# EAGLE board 01-pushbutton interface (EAGLE 9.3.0)
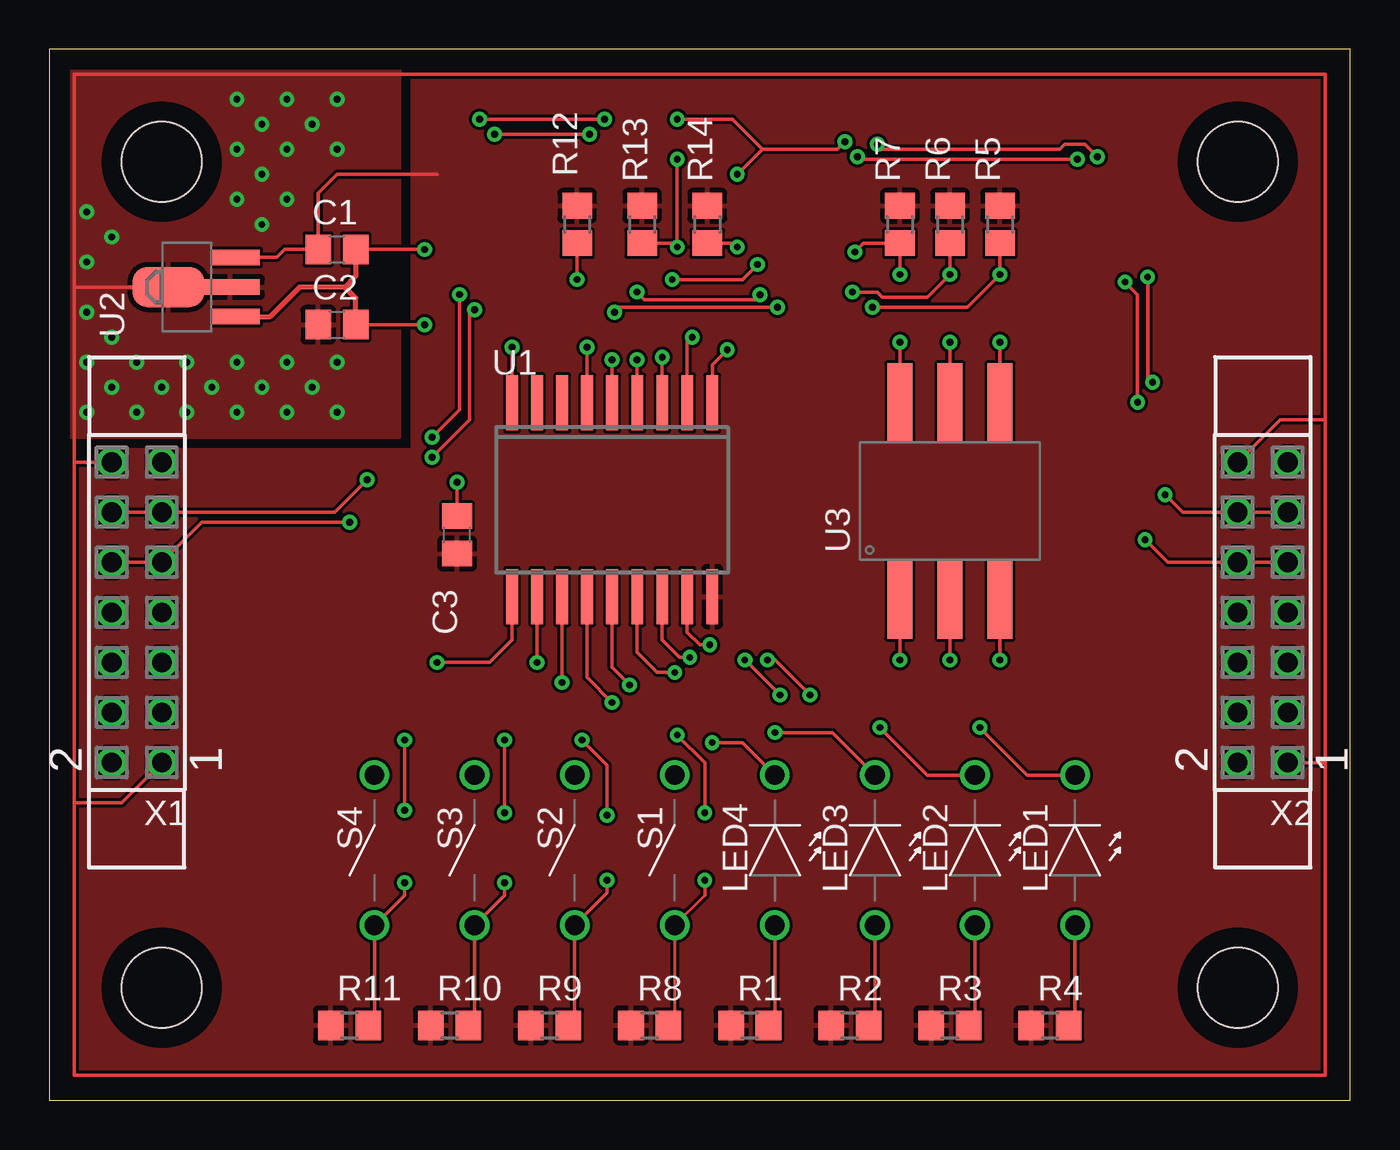
[diagram p0: board, top side]
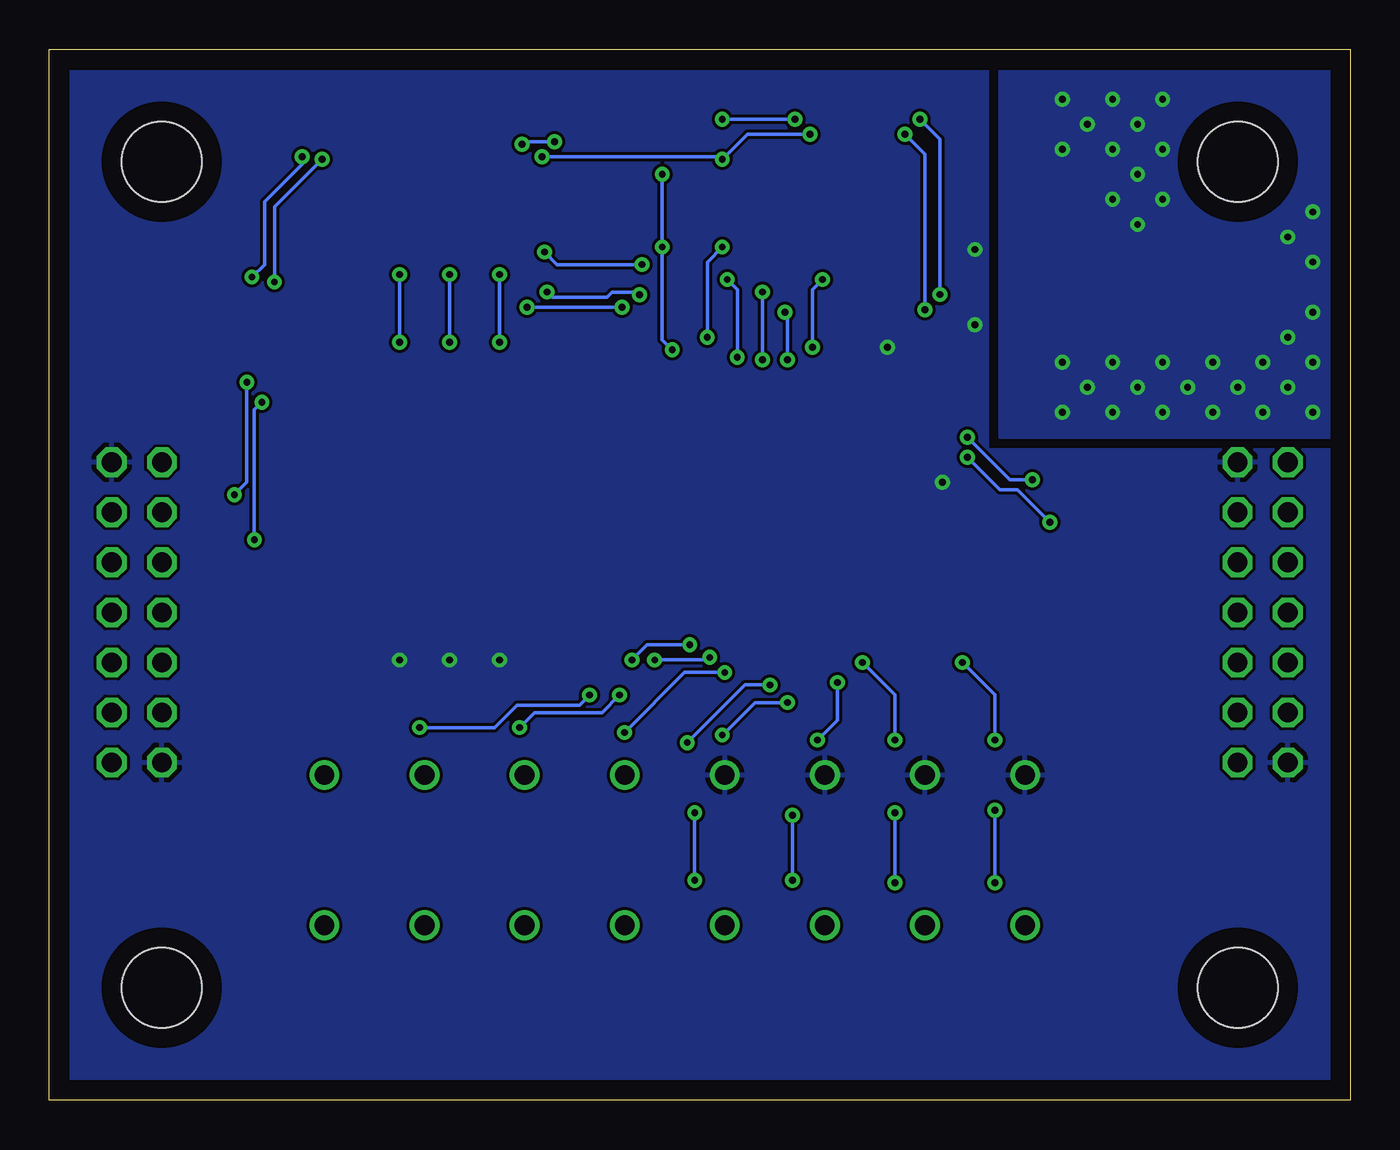
[diagram p1: board, bottom side, seen from below]

Size 66.04 x 53.34 mm. Coordinates in mm from the lower left corner, seen from the top.
Outline: 0,0 66.04,0 66.04,53.34 0,53.34 0,0
Copper layers (1*16): Top 0.035mm / dielectric 1.5mm / Bottom 0.035mm
Design rules "default": minimum track width 6mil, minimum drill 0.35mm, track to track 6mil, track to pad 6mil, pad to pad 6mil, via to via 6mil, smd to smd 6mil, copper to edge 40mil, drill to drill 6mil, minimum pad ring 10mil, minimum via ring 8mil, stop-mask expansion 4mil, vias tented up to drill 0mil, thermal gap 10mil
Holes 4.06 mm at 5.71,5.71 60.33,5.71 60.33,47.62 5.71,47.62

## Footprints (pad centres in the part's own frame; a part is rotated, then mirrored left to right if it is on the bottom)
C0805 = smd 1.3 x 1.5: 1 -0.95,0; 2 0.95,0
LED = drill 1: P$1 -3.81,0; P$2 3.81,0
R0805 = smd 1.3 x 1.5: 1 -0.95,0; 2 0.95,0
SWITCH = drill 1: P$1 -3.81,0; P$2 3.81,0
MCP23008-SO18 = smd 0.6 x 2.789: 1 -8.255,-4.912; 2 -6.985,-4.912; 3 -5.715,-4.912; 4 -4.445,-4.912; 5 -3.175,-4.912; 6 -1.905,-4.912; 7 -0.635,-4.912; 8 0.635,-4.912; 9 1.905,-4.912; 10 1.905,4.912; 11 0.635,4.912; 12 -0.635,4.912; 13 -1.905,4.912; 14 -3.175,4.912; 15 -4.445,4.912; 16 -5.715,4.912; 17 -6.985,4.912; 18 -8.255,4.912
MCP1700-SOT89 = smd 0.8 x 2.4: 1 -1.499,-2.5; 3 1.499,-2.5 | smd 0.8 x 3: 2 0,-2.2 | smd 2.032 x 3.65: 2@1 0,0.94
219-3LPSTR = smd 1.27 x 3.937: 1 -2.54,-5.08; 2 0,-5.08; 3 2.54,-5.08; 4 2.54,4.953; 5 0,4.953; 6 -2.54,4.953
SSW-107-02-G-D = drill 1 pad 1.5 octagon: 1 -7.62,-1.27; 2 -7.62,1.27; 3 -5.08,-1.27; 4 -5.08,1.27; 5 -2.54,-1.27; 6 -2.54,1.27; 7 0,-1.27; 8 0,1.27; 9 2.54,-1.27; 10 2.54,1.27; 11 5.08,-1.27; 12 5.08,1.27; 13 7.62,-1.27; 14 7.62,1.27

## Placement (x,y rotation side)
C1  1u  [C0805]  14.61,43.18 0 top
C2  1u  [C0805]  14.61,39.37 0 top
C3  100n  [C0805]  20.7,28.7 90 top
LED1  559-XXX-007  [LED]  52.07,12.7 90 top
LED2  559-XXX-007  [LED]  46.99,12.7 90 top
LED3  559-XXX-007  [LED]  41.91,12.7 90 top
LED4  559-XXX-007  [LED]  36.83,12.7 90 top
R1  100  [R0805]  35.56,3.81 0 top
R2  100  [R0805]  40.64,3.81 0 top
R3  100  [R0805]  45.72,3.81 0 top
R4  100  [R0805]  50.8,3.81 0 top
R5  100K  [R0805]  48.26,44.45 270 top
R6  100K  [R0805]  45.72,44.45 270 top
R7  100K  [R0805]  43.18,44.45 270 top
R8  100K  [R0805]  30.48,3.81 0 top
R9  100K  [R0805]  25.4,3.81 0 top
R10  100K  [R0805]  20.32,3.81 0 top
R11  100K  [R0805]  15.24,3.81 0 top
R12  100K  [R0805]  26.8,44.45 270 top
R13  2.2K  [R0805]  30.1,44.45 270 top
R14  2.2K  [R0805]  33.4,44.45 270 top
S1  PB-SWITCH  [SWITCH]  31.75,12.7 90 top
S2  PB-SWITCH  [SWITCH]  26.67,12.7 90 top
S3  PB-SWITCH  [SWITCH]  21.59,12.7 90 top
S4  PB-SWITCH  [SWITCH]  16.51,12.7 90 top
U1  MCP23008  [MCP23008-SO18]  25.4,30.48 180 top
U2  MCP1700-SOT89  [MCP1700-SOT89]  6.99,41.27 90 top
U3  219-3LPSTR  [219-3LPSTR]  45.72,30.48 0 top
X1  SSW-107-02-G-D  [SSW-107-02-G-D]  4.45,24.77 90 top
X2  SSW-107-02-G-D  [SSW-107-02-G-D]  61.59,24.77 90 top

## Library data of the parts
C1-C3 = rcl; SPICEPREFIX: C
LED1-LED4 S1-S4 U1-U3 = MIDI router parts
R1-R14 = rcl; SPICEPREFIX: R
X1 X2 = MIDI router parts; MF: Samtec Inc.; MPN: SSW-107-02-G-D; OC_FARNELL: unknown; OC_NEWARK: 11P9431

## Nets
+3V3: C1.1 C3.1 R1.1 R2.1 R3.1 R4.1 R5.1 R6.1 R7.1 R8.1 R9.1 R10.1 R11.1 R12.1 R13.1 R14.1 U1.18 U2.3
+5V: C2.1 U2.2 U2.2@1 X1.1 X1.14 X2.1 X2.14
GND: C1.2 C2.2 C3.2 S1.P$2 S2.P$2 S3.P$2 S4.P$2 U1.9 U2.1 U3.1 U3.2 U3.3 X1.2 X1.13 X2.2 X2.13
N$1: R8.2 S1.P$1 U1.13
N$2: R9.2 S2.P$1 U1.12
N$3: LED4.P$1 R1.2
N$4: LED3.P$1 R2.2
N$5: LED2.P$1 R3.2
N$6: LED1.P$1 R4.2
N$7: LED1.P$2 U1.17
N$8: LED2.P$2 U1.16
N$9: LED3.P$2 U1.15
N$10: LED4.P$2 U1.14
N$11: R7.2 U1.3 U3.6
N$12: R6.2 U1.4 U3.5
N$13: R5.2 U1.5 U3.4
N$14: R10.2 S3.P$1 U1.11
N$15: R11.2 S4.P$1 U1.10
N$16: R12.2 U1.6
SCL: R14.2 U1.1 X1.11 X1.12 X2.11 X2.12
SDA: R13.2 U1.2 X1.9 X1.10 X2.9 X2.10

## Tracks (layer width: path | path; a pad name or v marks a point on that pad's centre or on a via)
+3V3
  Top 0.178: U2.3 11.53,42.77 11.94,43.18 C1.1 13.65,46.04 14.61,46.99 19.68,46.99
  pour Top: 0.64,0.64 65.41,0.64 65.41,52.7 18.41,52.7 18.41,33.02 0.64,33.02
+5V  (via drill 0.35)
  Top 0.178: X1.14 1.27,32.38 | 64.77,17.14 64.77,1.27 1.27,1.27 1.27,15.11 | 64.77,17.14 64.77,34.54 | 64.77,34.54 64.77,52.07 1.27,52.07 1.27,41.27 | 1.27,32.38 1.27,15.11 | 1.27,41.27 1.27,32.38 | U2.2@1 1.27,41.27 | X1.1 3.68,15.11 1.27,15.11 | X2.14 62.48,34.54 64.77,34.54 | X2.1 64.77,17.14
  other vias: 1.91,45.09 3.17,43.81 1.91,42.55 1.91,40.01 3.17,38.73 1.91,37.47 1.91,34.92 3.17,36.2 4.45,37.47 4.45,34.92 5.71,36.2 6.99,37.47 6.99,34.92 8.26,36.2 9.53,37.47 10.79,36.2 9.53,34.92 12.06,34.92 14.61,34.92 13.34,36.2 14.61,37.47 12.06,37.47 10.79,44.45 9.53,45.72 12.06,45.72 10.79,46.99 14.61,48.26 12.06,48.26 9.53,48.26 13.34,49.53 10.79,49.53 14.61,50.8 12.06,50.8 9.53,50.8
  pour Top: 0.64,52.7 17.78,52.7 17.78,33.66 0.64,33.66
  pour Bottom: 17.78,52.7 17.78,33.66 0.64,33.66 0.64,52.7
GND  (via drill 0.35)
  Top 0.178: U3.3 v48.26,22.35 | C3.2 v20.7,31.37 | C1.2 v19.05,43.18 | C2.2 v19.05,39.37 | U1.9 v23.5,38.23 | U3.2 v45.72,22.35 | U3.1 v43.18,22.35
  Top 0.254: U2.1 11.2,39.78 12.7,41.27 14.99,41.27 | C2.2 15.55,40.71 14.99,41.27 | C1.2 15.55,41.84 14.99,41.27
  pour Bottom: 0.64,32.38 0.64,0.64 65.41,0.64 65.41,52.7 18.41,52.7 18.41,33.02 0.64,33.02
N$1  (via drill 0.35)
  Top 0.152: 33.27,10.41 S1.P$1 31.75,4.13
  Top 0.178: 31.75,4.13 R8.2 | 33.27,10.41 v33.27,11.18 | v33.27,14.61 33.27,17.14 v31.88,18.54 | v28.57,20.19 27.3,21.46 U1.13
  Bottom 0.178: v33.27,11.18 v33.27,14.61 | v31.88,18.54 30.23,20.19 v28.57,20.19
N$2  (via drill 0.35)
  Top 0.178: R9.2 26.38,3.84 26.67,4.13 S2.P$1 28.32,10.54 v28.32,11.18 | v28.32,14.48 28.32,17.02 v27.05,18.29 | v26.04,21.21 U1.12
  Bottom 0.178: v28.32,11.18 v28.32,14.48 | v27.05,18.29 26.04,19.3 v26.04,21.21
N$3
  Top 0.178: LED4.P$1 36.83,4.13 R1.2
N$4
  Top 0.178: LED3.P$1 41.91,4.13 R2.2
N$5
  Top 0.178: LED2.P$1 46.99,4.13 R3.2
N$6
  Top 0.178: LED1.P$1 52.07,4.13 R4.2
N$7  (via drill 0.35)
  Top 0.178: v47.24,18.92 49.66,16.51 LED1.P$2 | v38.61,20.57 36.83,22.35 v36.45,22.35 | v33.53,23.11 33.02,23.11 32.38,23.75 U1.17
  Bottom 0.178: v47.24,18.92 43.43,18.92 42.29,20.07 39.12,20.07 v38.61,20.57 | v36.45,22.35 35.69,23.11 v33.53,23.11
N$8  (via drill 0.35)
  Top 0.178: v42.16,18.92 44.58,16.51 LED2.P$2 | v37.08,20.57 v35.31,22.35 | v32.51,22.48 32,22.48 31.11,23.37 U1.16
  Bottom 0.178: v35.31,22.35 32.64,22.35 v32.51,22.48 | v42.16,18.92 41.4,19.68 37.97,19.68 v37.08,20.57
N$9  (via drill 0.35)
  Top 0.178: v36.83,18.67 39.75,18.67 LED3.P$2 | v31.75,21.72 30.86,21.72 29.84,22.73 U1.15
  Bottom 0.178: v36.83,18.67 33.78,21.72 v31.75,21.72
N$10  (via drill 0.35)
  Top 0.178: v33.66,18.16 35.18,18.16 LED4.P$2 | v29.46,21.08 28.57,21.97 U1.14
  Bottom 0.178: v33.66,18.16 30.73,21.08 v29.46,21.08
N$11  (via drill 0.35)
  Top 0.178: U3.6 v43.18,38.48 | v43.18,41.91 R7.2 41.34,43.5 v40.89,43.05 | v35.94,42.42 35.18,41.66 v31.62,41.66 | v31.11,37.72 U1.3
  Bottom 0.178: v43.18,38.48 v43.18,41.91 | v40.89,43.05 40.26,42.42 v35.94,42.42 | v31.62,41.66 31.11,41.15 v31.11,37.72
N$12  (via drill 0.35)
  Top 0.178: U3.5 v45.72,38.48 | R6.2 v45.72,41.91 44.58,40.77 42.29,40.77 42.04,41.02 v40.77,41.02 | v36.07,40.88 36.05,40.88 35.81,40.64 30.23,40.64 v29.84,41.02 | v29.84,37.59 U1.4
  Bottom 0.178: v45.72,38.48 v45.72,41.91 | v40.77,41.02 40.51,40.77 37.72,40.77 37.47,41.02 36.21,41.02 v36.07,40.88 | v29.84,41.02 v29.84,37.59
N$13  (via drill 0.35)
  Top 0.178: U3.4 v48.26,38.48 | R5.2 v48.26,41.91 46.61,40.26 v41.78,40.26 | v36.96,40.26 28.96,40.26 v28.7,40.01 | v28.57,37.59 U1.5
  Bottom 0.178: v48.26,38.48 v48.26,41.91 | v41.78,40.26 v36.96,40.26 | v28.7,40.01 28.57,39.88 v28.57,37.59
N$14  (via drill 0.35)
  Top 0.178: v23.11,11.05 23.11,10.41 S3.P$1 21.59,4.13 R10.2 | v23.11,14.61 v23.11,18.29 | v24.77,22.23 U1.11
  Bottom 0.178: v23.11,11.05 v23.11,14.61 | v23.11,18.29 23.11,20.57 v24.77,22.23
N$15  (via drill 0.35)
  Top 0.178: v18.03,11.05 18.03,10.41 S4.P$1 16.51,4.13 R11.2 | v18.03,14.73 v18.03,18.29 | v19.68,22.23 22.35,22.23 23.5,23.37 U1.10
  Bottom 0.178: v18.03,11.05 v18.03,14.73 | v18.03,18.29 18.03,20.57 v19.68,22.23
N$16  (via drill 0.35)
  Top 0.178: U1.6 v27.3,38.23 | v26.8,41.66 R12.2
  Bottom 0.178: v27.3,38.23 27.3,41.15 v26.8,41.66
SCL  (via drill 0.35)
  Top 0.178: R14.2 34.73,43.5 v34.92,43.31 | v34.42,38.1 33.66,37.34 U1.1 | X1.12 X1.11 14.48,29.84 v16.13,31.5 | X2.11 X2.12 57.53,29.84 v56.64,30.73 | v56.01,36.45 55.75,36.7 v55.75,41.78 | v53.21,47.88 52.58,48.51 51.56,48.51 51.31,48.26 42.29,48.26 v42.04,48.51 | v40.39,48.64 40.01,48.26 36.2,48.26 | 36.2,48.26 v34.92,46.99 | v19.43,33.66 20.83,35.05 v20.83,40.89 | v21.84,49.78 v28.19,49.78 | v31.88,49.78 34.67,49.78 36.2,48.26
  Bottom 0.178: v34.42,38.1 34.92,38.61 v34.92,43.31 v34.92,46.99 | v56.64,30.73 56.01,31.37 v56.01,36.45 | v55.75,41.78 55.12,42.42 55.12,45.59 53.21,47.5 v53.21,47.88 | v42.04,48.51 41.91,48.64 v40.39,48.64 | v16.13,31.5 17.27,31.5 v19.43,33.66 | v20.83,40.89 20.83,48.77 v21.84,49.78 | v28.19,49.78 v31.88,49.78
SDA  (via drill 0.35)
  Top 0.178: R13.2 31.68,43.5 v31.88,43.31 v31.88,47.75 | v32.64,38.73 32.38,38.48 U1.2 | X1.10 X1.9 7.75,29.34 v15.24,29.34 | X2.9 X2.10 56.77,27.3 v55.63,28.45 | v55.24,35.43 55.24,40.89 v54.61,41.53 | v52.2,47.75 41.15,47.75 v41.02,47.88 | v19.43,32.64 21.34,34.54 21.34,39.88 v21.59,40.13 | v22.61,49.02 v27.43,49.02
  Bottom 0.178: v31.88,43.31 32.64,42.55 v32.64,38.73 | v55.63,28.45 55.63,35.05 v55.24,35.43 | v54.61,41.53 54.61,45.34 v52.2,47.75 | v41.02,47.88 32,47.88 v31.88,47.75 30.61,49.02 v27.43,49.02 | v15.24,29.34 16.89,30.99 17.78,30.99 v19.43,32.64 | v21.59,40.13 21.59,48.01 v22.61,49.02

## Text on the board
tDocu: HW0005 | R001